# Altium PCB ControllerMain_V1.PcbDoc (part 1 of 2)
Units mil, origin at the board's own origin, x right, y up, seen from the top; angles counter-clockwise.
Board outline 3937.01 x 590.55 mil, 4 copper layers (Top Layer, Layer 1, Layer 2, Bottom Layer), stack 23.756 mil thick; 51 components, 76 nets, 244 pads, 93 vias.
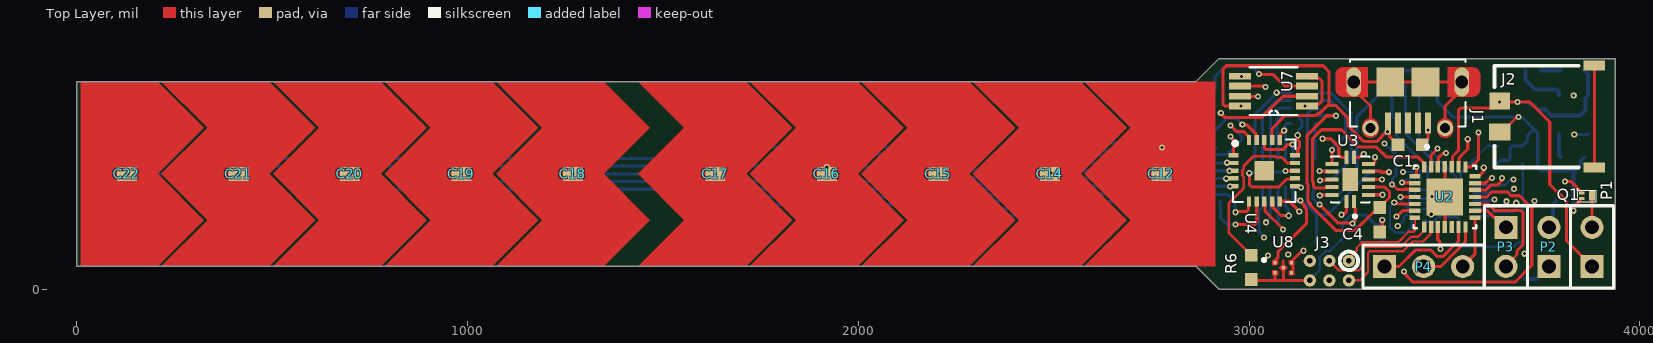
[diagram p0: Top Layer view]
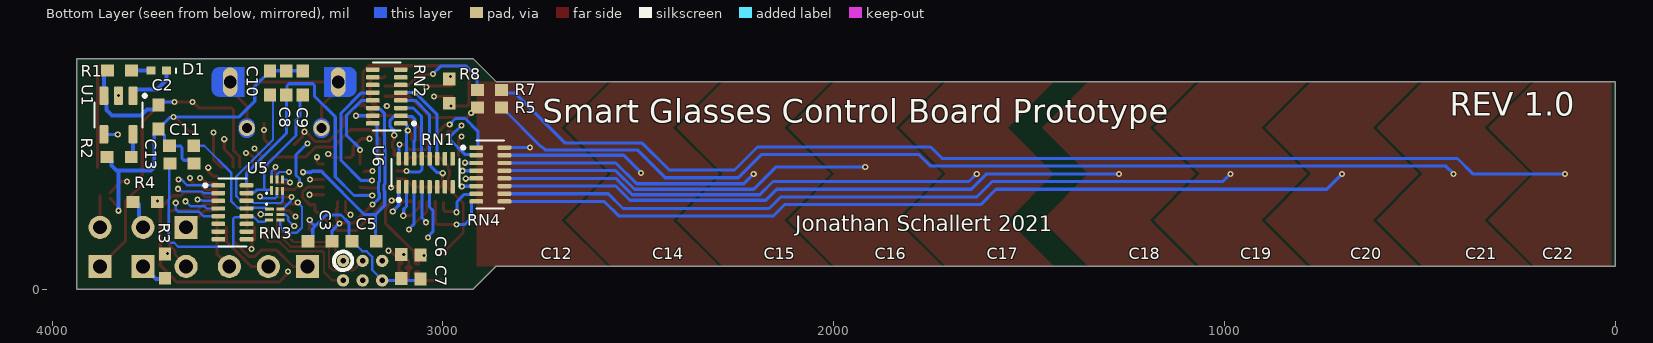
[diagram p1: Bottom Layer view, seen from below]
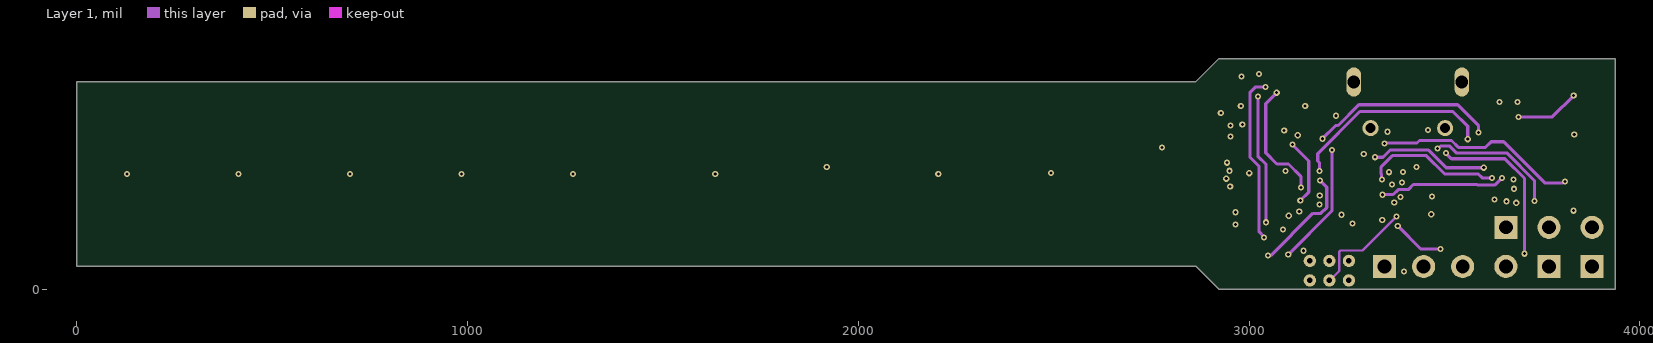
[diagram p2: Layer 1]
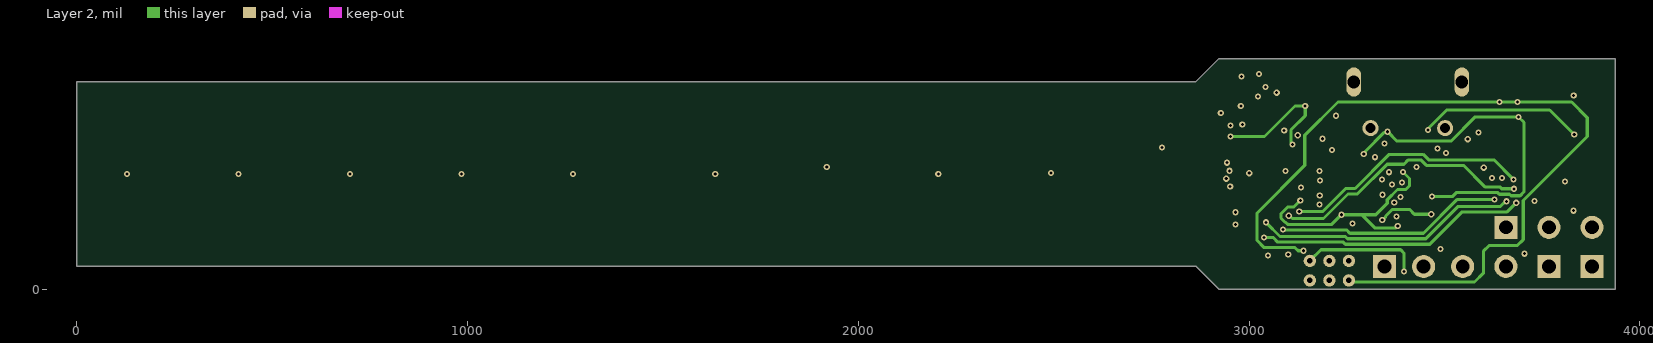
[diagram p3: Layer 2]
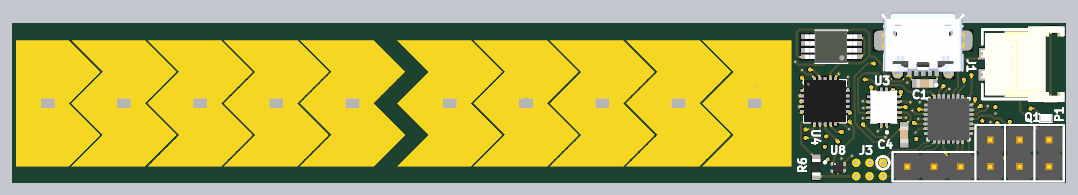
[diagram p5: 3D render of the assembled board from above, using the file's embedded part models]
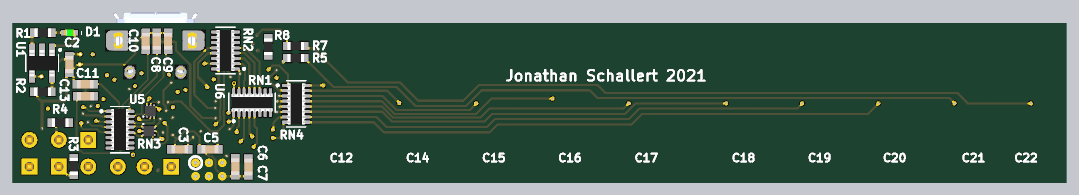
[diagram p6: 3D render of the assembled board from below, using the file's embedded part models]

## Layer stack, top to bottom
Top Solder: solder mask 0.4, Solder Resist, Dk 3.5
Top Layer: signal copper 1.4
Dielectric 2: prepreg 2.8, PP-006, Dk 4.1
Layer 1: signal copper 1.378
Dielectric 1: dielectric 12.6, FR-4, Dk 4.8
Layer 2: signal copper 1.378
Dielectric 3: prepreg 2.8, PP-006, Dk 4.1
Bottom Layer: signal copper 1.4
Bottom Solder: solder mask 0.4, Solder Resist, Dk 3.5

## Board outline
0,59.06 2864.17,59.06 2923.23,0 3937.01,0 3937.01,590.55 2923.23,590.55 2864.17,531.5 0,531.5

## Design rules (kind name [scope] priority, off if disabled: settings)
Clearance [All] p1: gap=5.5 ignorepadtopadclearanceinfootprint=FALSE
MinimumSolderMaskSliver [All] p1: minsoldermaskwidth=2
PolygonConnect [All] p1: connectstyle=Relief reliefconductorwidth=10 reliefentries=4 polygonreliefangle="90 Angle" airgapwidth=10
RoutingVias [All] p1: holewidth=28 width=50 viastyle="Through Hole" minholewidth=28 minwidth=50 maxholewidth=28 maxwidth=50
SilkToSilkClearance [All] p1: silktosilkclearance=6
SilkToSolderMaskClearance [IsPad] p1: minsilkscreentomaskgap=3 clearancetoexposedcopper=TRUE
SolderMaskExpansion [All] p1: expansion=4 istentingtop=FALSE
Width [All] p1: maxlimit=50 minlimit=6 preferedwidth=8
27 further rules are at their usual default settings.

## Components (designator, comment, footprint, x,y, rotation, side; value= is the part's Value field where it differs from the comment)
C1 "4.7uF" 0603_CAP 3412.4,370.08 r0 top
C2 "10uF" 0603_CAP 3728.35,440.94 r90 bottom
C3 "1uF" 0603_CAP 3314.8,123.06 r180 bottom
C4 "1uF" 0603_CAP 3335,178 r90 top
C5 "1uF" 0603_CAP 3201.8,123.06 r180 bottom
C6 "1uF" 0603_CAP 3106.8,58.06 r90 bottom
C7 "1uF" 0603_CAP 3057.8,57.06 r270 bottom
C8 "1uF" 0603_CAP 3400.8,528.06 r270 bottom
C9 "1uF" 0603_CAP 3358.8,528.06 r270 bottom
C10 "1uF" 0603_CAP 3442.8,528.06 r270 bottom
C11 "1uF" 0603_CAP 3668.8,367.06 r180 bottom
C12 "Human Body Model" TOUCHSENSE_SLIDE1-END2 2775.59,295.28 r0 top
C13 "1uF" 0603_CAP 3667.8,322.06 r180 bottom
C14 "Human Body Model" TOUCHSENSE_SLIDE1 2490.16,295.28 r0 top
C15 "Human Body Model" TOUCHSENSE_SLIDE1 2204.72,295.28 r0 top
C16 "Human Body Model" TOUCHSENSE_SLIDE1 1919.29,295.28 r0 top
C17 "Human Body Model" TOUCHSENSE_SLIDE1 1633.86,295.28 r0 top
C18 "Human Body Model" TOUCHSENSE_SLIDE1 1269.69,295.28 r0 top
C19 "Human Body Model" TOUCHSENSE_SLIDE1 984.25,295.28 r0 top
C20 "Human Body Model" TOUCHSENSE_SLIDE1 698.82,295.28 r0 top
C21 "Human Body Model" TOUCHSENSE_SLIDE1 413.39,295.28 r0 top
C22 "Human Body Model" TOUCHSENSE_SLIDE1-END1 127.95,295.28 r0 top
D1 "APHHS1005CGCK" 0402-LED-G 3727.36,560.04 r0 bottom
J1 "ZX62D-B-5P8" Micro_USB 3406.5,527.56 r180 top
J2 "DF59-2S-2V(51)" SNAPBEE_DF59-2S-2V 3762.8,441.93 r270 top
J3 "6 Pin ISP Header" CONN_ISP_TINY 3255.71,72.64 r180 top
P1 "HEADER_1x2_POLAR" PIN2 3877.95,58.46 r90 top
P2 "HEADER_1x2" PIN2 3767.72,58.46 r90 top
P3 "HEADER_1x2" PIN2 3657.48,158.46 r270 top
P4 "HEADER_1x3" PIN3 3346.85,58.07 r0 top
Q1 "CSD17381F4" PICOSTAR-3 3864.8,239.06 r0 top
R1 "220Ω" 0603_RES 3827.76,560.04 r0 bottom
R2 "2K2Ω" 0603_RES 3828.74,338.58 r180 bottom
R3 "100Ω" 0603_RES 3711.61,59.06 r90 bottom
R4 "100Ω" 0603_RES 3762.3,223.43 r180 bottom
R5 "4K99Ω" 0603_RES 2880.8,465.06 r0 bottom
R6 "10KΩ" 0603_RES 3005.8,56.06 r90 top
R7 "4K99Ω" 0603_RES 2880.8,510.06 r0 bottom
R8 "10KΩ" 0603_RES 2983.8,507.06 r270 bottom
RN1 "EXB-Q16P682J" RES-ARRAY-16_EXB 3044.27,298.03 r90 bottom
RN2 "EXB-2HV472JV" RES-ARRAY-16_EXB 3143.77,493.27 r0 bottom
RN3 "EXB-2HV472JV" RES-ARRAY-16_EXB 3538.82,196.84 r180 bottom
RN4 "EXB-2HV472JV" RES-ARRAY-16_EXB 2878.77,293.58 r180 bottom
U1 "MCP73831T-4ADI/OT" SOT-23-5-N 3830.71,445.87 r270 bottom
U2 "ATMEGA328-MMHR" QFN-28_4X4 3501.19,236.25 r270 top
U3 "74LV14BQ,115" DHVQFN-14 3259.14,281.06 r180 top
U4 "MTCH108-I/GZ" UQFN-20_4x4 3039.43,303.31 r0 top
U5 "NC7WZ14FHX" MICROPAK2 3424.8,266.43 r90 bottom
U6 "NC7WZ14FHX" MICROPAK2 3430.8,191.06 r180 bottom
U7 "MTCH102-I/MS" MSOP-8 3062.8,507.06 r180 top
U8 "S-1318D33-A4T2U4" HSNT-4-B 3087.8,55.06 r0 top

## Footprints (in the part's own frame and the unit in brackets; to place one, negate y for a bottom-side part, rotate by r counter-clockwise, add the part's x,y. Pads: shape width x height; smd on the part's side, far side on the other; paste and mask are expansions set on the pad)
0402-LED-G [mm] "Chip LED, Green 0402"
  rect 0.6x0.5 smd: 1(-0.5,0) 2(0.5,0)
  silkscreen extent -1.12,-0.13 -1.12,0.17, body extent -0.5,-0.3 0.5,0.3, height 0.2
0603_CAP [mil]
  rect 33x31.5 smd: 1(-31,0) 2(31,0)
  body extent -32,-16 31,16, height 32
0603_RES [mil]
  rect 33x31.5 smd: 1(-31,0) 2(31,0)
  body extent -31,-16 31,16, height 18
CONN_ISP_TINY [mm]
  round 0.8 hole 0.35 mask+0: 1(0,0) 2(0,1.27) 3(1.27,0) 4(1.27,1.27) 5(2.54,0) 6(2.54,1.27)
  silkscreen extent -0.6,-0.6 0.6,0.6
DHVQFN-14 [mm]
  rrect25% 0.26x0.86 smd: 1(-0.25,1.435) 7(-0.25,-1.435) 8(0.25,-1.435) 14(0.25,1.435)
  rrect25% 0.86x0.26 smd: 2(-1.185,1) 3(-1.185,0.5) 4(-1.185,0) 5(-1.185,-0.5) 6(-1.185,-1) 9(1.185,-1) 10(1.185,-0.5) 11(1.185,0) 12(1.185,0.5) 13(1.185,1)
  rect 1x1.5 smd paste-2: 15(0,0)
  silkscreen extent -1.25,-1.5 1.25,2.5, body extent -1.25,-1.5 1.25,1.5, height 0.86
HSNT-4-B [mm]
  rect 0.2x0.2 smd paste-1 mask+0: 1(-0.53,0.325) 2(-0.53,-0.325) 3(0.53,-0.325) 4(0.53,0.325)
  rect 0.2x0.2 smd paste+0.036 mask+0: 5(0,0)
  Top Layer region: 0.062,0.242 0.304,0 0.062,-0.242 0.062,-0.51 -0.062,-0.51 -0.062,-0.242 -0.304,0 -0.062,0.242 -0.062,0.51 0.062,0.51
  Top Layer region: -0.345,-0.245 -0.345,-0.475 -0.715,-0.475 -0.715,-0.175 -0.415,-0.175
  Top Layer region: 0.715,0.175 0.415,0.175 0.345,0.245 0.345,0.475 0.715,0.475
  Top Layer region: 0.715,-0.475 0.345,-0.475 0.345,-0.245 0.415,-0.175 0.715,-0.175
  Top Layer region: -0.345,0.245 -0.415,0.175 -0.715,0.175 -0.715,0.475 -0.345,0.475
  silkscreen extent -1.35,0.4 -1.15,0.6, body extent -0.53,-0.51 0.53,0.5, height 0.38
Micro_USB [mm]
  rect 0.4x1.35 smd mask+0.051: 1(-1.3,2.6) 2(-0.65,2.6) 3(0,2.6) 4(0.65,2.6) 5(1.3,2.6)
  round 1.05 hole 0.65: S1(-2.425,2.925) S2(2.425,2.925)
  oval 0.95x1.9 hole 0.825: S3(-3.512,-0.075) S6(3.512,-0.075)
  rect 1.8x1.9 smd: S4(-1.15,-0.075) S5(1.15,-0.075)
  Top Layer region: 3.1,-0.075 2.6,-0.075 2.6,0.875 4.2,0.875 4.213,0.875 4.239,0.874 4.265,0.871 4.291,0.867 4.317,0.861 4.342,0.855 4.367,0.846 4.391,0.837 4.415,0.826 4.439,0.815 4.461,0.801 4.483,0.787 4.504,0.772 4.525,0.755 4.544,0.738 4.563,0.719 4.58,0.7 4.597,0.679 4.612,0.658 4.626,0.636 4.64,0.614 4.651,0.59 4.662,0.566 4.671,0.542 4.68,0.517 4.686,0.492 4.692,0.466 4.696,0.44 4.699,0.414 4.7,0.388 4.7,0.375 4.7,-0.075 3.925,-0.075 3.925,0.4 3.925,0.407 3.924,0.422 3.923,0.436 3.92,0.45 3.917,0.464 3.914,0.478 3.909,0.492 3.904,0.505 3.898,0.518 3.892,0.531 3.885,0.544 3.877,0.556 3.868,0.567 3.859,0.579 3.85,0.589 3.839,0.6 3.829,0.609 3.817,0.618 3.806,0.627 3.794,0.635 3.781,0.642 3.768,0.648 3.755,0.654 3.742,0.659 3.728,0.664 3.714,0.667 3.7,0.67 3.686,0.673 3.672,0.674 3.657,0.675 3.65,0.675 3.4,0.675 3.392,0.675 3.376,0.674 3.361,0.673 3.345,0.67 3.33,0.667 3.315,0.663 3.3,0.658 3.285,0.652 3.271,0.646 3.257,0.639 3.243,0.631 3.23,0.622 3.217,0.613 3.205,0.603 3.193,0.593 3.182,0.582 3.172,0.57 3.162,0.558 3.153,0.545 3.144,0.532 3.136,0.518 3.129,0.504 3.123,0.49 3.117,0.475 3.112,0.46 3.108,0.445 3.105,0.43 3.102,0.414 3.101,0.399 3.1,0.383 3.1,0.375 3.1,-0.075
  Top Layer region: -3.1,-0.075 -2.6,-0.075 -2.6,-1.025 -4.2,-1.025 -4.213,-1.025 -4.239,-1.024 -4.265,-1.021 -4.291,-1.017 -4.317,-1.011 -4.342,-1.005 -4.367,-0.996 -4.391,-0.987 -4.415,-0.976 -4.439,-0.965 -4.461,-0.951 -4.483,-0.937 -4.504,-0.922 -4.525,-0.905 -4.544,-0.888 -4.563,-0.869 -4.58,-0.85 -4.597,-0.829 -4.612,-0.808 -4.626,-0.786 -4.64,-0.764 -4.651,-0.74 -4.662,-0.716 -4.671,-0.692 -4.68,-0.667 -4.686,-0.642 -4.692,-0.616 -4.696,-0.59 -4.699,-0.564 -4.7,-0.538 -4.7,-0.525 -4.7,-0.075 -3.925,-0.075 -3.925,-0.55 -3.925,-0.557 -3.924,-0.572 -3.923,-0.586 -3.92,-0.6 -3.917,-0.614 -3.914,-0.628 -3.909,-0.642 -3.904,-0.655 -3.898,-0.668 -3.892,-0.681 -3.885,-0.694 -3.877,-0.706 -3.868,-0.717 -3.859,-0.729 -3.85,-0.739 -3.839,-0.75 -3.829,-0.759 -3.817,-0.768 -3.806,-0.777 -3.794,-0.785 -3.781,-0.792 -3.768,-0.798 -3.755,-0.804 -3.742,-0.809 -3.728,-0.814 -3.714,-0.817 -3.7,-0.82 -3.686,-0.823 -3.672,-0.824 -3.657,-0.825 -3.65,-0.825 -3.4,-0.825 -3.392,-0.825 -3.376,-0.824 -3.361,-0.823 -3.345,-0.82 -3.33,-0.817 -3.315,-0.813 -3.3,-0.808 -3.285,-0.802 -3.271,-0.796 -3.257,-0.789 -3.243,-0.781 -3.23,-0.772 -3.217,-0.763 -3.205,-0.753 -3.193,-0.743 -3.182,-0.732 -3.172,-0.72 -3.162,-0.708 -3.153,-0.695 -3.144,-0.682 -3.136,-0.668 -3.129,-0.654 -3.123,-0.64 -3.117,-0.625 -3.112,-0.61 -3.108,-0.595 -3.105,-0.58 -3.102,-0.564 -3.101,-0.549 -3.1,-0.533 -3.1,-0.525 -3.1,-0.075
  Top Layer region: 2.6,-1.025 4.2,-1.025 4.213,-1.025 4.239,-1.024 4.265,-1.021 4.291,-1.017 4.317,-1.011 4.342,-1.005 4.367,-0.996 4.391,-0.987 4.415,-0.976 4.439,-0.965 4.461,-0.951 4.483,-0.937 4.504,-0.922 4.525,-0.905 4.544,-0.888 4.563,-0.869 4.58,-0.85 4.597,-0.829 4.612,-0.808 4.626,-0.786 4.64,-0.764 4.651,-0.74 4.662,-0.716 4.671,-0.692 4.68,-0.667 4.686,-0.642 4.692,-0.616 4.696,-0.59 4.699,-0.564 4.7,-0.538 4.7,-0.525 4.7,-0.075 3.925,-0.075 3.925,-0.525 3.925,-0.533 3.924,-0.549 3.923,-0.564 3.92,-0.58 3.917,-0.595 3.913,-0.61 3.908,-0.625 3.902,-0.64 3.896,-0.654 3.889,-0.668 3.881,-0.682 3.872,-0.695 3.863,-0.708 3.853,-0.72 3.843,-0.732 3.832,-0.743 3.82,-0.753 3.808,-0.763 3.795,-0.772 3.782,-0.781 3.768,-0.789 3.754,-0.796 3.74,-0.802 3.725,-0.808 3.71,-0.813 3.695,-0.817 3.68,-0.82 3.664,-0.823 3.649,-0.824 3.633,-0.825 3.625,-0.825 3.4,-0.825 3.392,-0.825 3.376,-0.824 3.361,-0.823 3.345,-0.82 3.33,-0.817 3.315,-0.813 3.3,-0.808 3.285,-0.802 3.271,-0.796 3.257,-0.789 3.243,-0.781 3.23,-0.772 3.217,-0.763 3.205,-0.753 3.193,-0.743 3.182,-0.732 3.172,-0.72 3.162,-0.708 3.153,-0.695 3.144,-0.682 3.136,-0.668 3.129,-0.654 3.123,-0.64 3.117,-0.625 3.112,-0.61 3.108,-0.595 3.105,-0.58 3.102,-0.564 3.101,-0.549 3.1,-0.533 3.1,-0.525 3.1,-0.075 2.6,-0.075 2.6,-1.025
  Top Layer region: -2.6,0.875 -4.2,0.875 -4.213,0.875 -4.239,0.874 -4.265,0.871 -4.291,0.867 -4.317,0.861 -4.342,0.855 -4.367,0.846 -4.391,0.837 -4.415,0.826 -4.439,0.815 -4.461,0.801 -4.483,0.787 -4.504,0.772 -4.525,0.755 -4.544,0.738 -4.563,0.719 -4.58,0.7 -4.597,0.679 -4.612,0.658 -4.626,0.636 -4.64,0.614 -4.651,0.59 -4.662,0.566 -4.671,0.542 -4.68,0.517 -4.686,0.492 -4.692,0.466 -4.696,0.44 -4.699,0.414 -4.7,0.388 -4.7,0.375 -4.7,-0.075 -3.925,-0.075 -3.925,0.375 -3.925,0.383 -3.924,0.399 -3.923,0.414 -3.92,0.43 -3.917,0.445 -3.913,0.46 -3.908,0.475 -3.902,0.49 -3.896,0.504 -3.889,0.518 -3.881,0.532 -3.872,0.545 -3.863,0.558 -3.853,0.57 -3.843,0.582 -3.832,0.593 -3.82,0.603 -3.808,0.613 -3.795,0.622 -3.782,0.631 -3.768,0.639 -3.754,0.646 -3.74,0.652 -3.725,0.658 -3.71,0.663 -3.695,0.667 -3.68,0.67 -3.664,0.673 -3.649,0.674 -3.633,0.675 -3.625,0.675 -3.4,0.675 -3.392,0.675 -3.376,0.674 -3.361,0.673 -3.345,0.67 -3.33,0.667 -3.315,0.663 -3.3,0.658 -3.285,0.652 -3.271,0.646 -3.257,0.639 -3.243,0.631 -3.23,0.622 -3.217,0.613 -3.205,0.603 -3.193,0.593 -3.182,0.582 -3.172,0.57 -3.162,0.558 -3.153,0.545 -3.144,0.532 -3.136,0.518 -3.129,0.504 -3.123,0.49 -3.117,0.475 -3.112,0.46 -3.108,0.445 -3.105,0.43 -3.102,0.414 -3.101,0.399 -3.1,0.383 -3.1,0.375 -3.1,-0.075 -2.6,-0.075 -2.6,0.875
  Top Layer region: 2.425,2.5 2.425,2.3 2.411,2.3 2.384,2.301 2.356,2.304 2.329,2.309 2.302,2.314 2.276,2.321 2.25,2.33 2.224,2.34 2.199,2.351 2.174,2.363 2.151,2.377 2.128,2.392 2.105,2.408 2.084,2.426 2.063,2.444 2.044,2.463 2.026,2.484 2.008,2.505 1.992,2.528 1.977,2.551 1.963,2.574 1.951,2.599 1.94,2.624 1.93,2.65 1.921,2.676 1.914,2.702 1.909,2.729 1.904,2.756 1.901,2.784 1.9,2.811 1.9,2.825 1.9,3.025 1.9,3.039 1.901,3.066 1.904,3.094 1.909,3.121 1.914,3.148 1.921,3.174 1.93,3.2 1.94,3.226 1.951,3.251 1.963,3.276 1.977,3.299 1.992,3.322 2.008,3.345 2.026,3.366 2.044,3.387 2.063,3.406 2.084,3.424 2.105,3.442 2.128,3.458 2.151,3.473 2.174,3.487 2.199,3.499 2.224,3.51 2.25,3.52 2.276,3.529 2.302,3.536 2.329,3.541 2.356,3.546 2.384,3.549 2.411,3.55 2.425,3.55 2.425,3.35 2.416,3.35 2.399,3.349 2.383,3.347 2.366,3.345 2.349,3.341 2.333,3.337 2.316,3.331 2.301,3.325 2.285,3.318 2.27,3.311 2.255,3.302 2.241,3.293 2.227,3.283 2.214,3.272 2.201,3.261 2.189,3.249 2.178,3.236 2.167,3.223 2.157,3.209 2.148,3.195 2.139,3.18 2.132,3.165 2.125,3.149 2.119,3.134 2.113,3.117 2.109,3.101 2.105,3.084 2.103,3.067 2.101,3.051 2.1,3.034 2.1,3.025 2.1,2.825 2.1,2.816 2.101,2.799 2.103,2.783 2.105,2.766 2.109,2.749 2.113,2.733 2.119,2.716 2.125,2.701 2.132,2.685 2.139,2.67 2.148,2.655 2.157,2.641 2.167,2.627 2.178,2.614 2.189,2.601 2.201,2.589 2.214,2.578 2.227,2.567 2.241,2.557 2.255,2.548 2.27,2.539 2.285,2.532 2.301,2.525 2.316,2.519 2.333,2.513 2.349,2.509 2.366,2.505 2.383,2.503 2.399,2.501 2.416,2.5 2.425,2.5
  Top Layer region: 2.425,3.35 2.425,3.55 2.439,3.55 2.466,3.549 2.494,3.546 2.521,3.541 2.548,3.536 2.574,3.529 2.6,3.52 2.626,3.51 2.651,3.499 2.676,3.487 2.699,3.473 2.722,3.458 2.745,3.442 2.766,3.424 2.787,3.406 2.806,3.387 2.824,3.366 2.842,3.345 2.858,3.322 2.873,3.299 2.887,3.276 2.899,3.251 2.91,3.226 2.92,3.2 2.929,3.174 2.936,3.148 2.941,3.121 2.946,3.094 2.949,3.066 2.95,3.039 2.95,3.025 2.95,2.825 2.95,2.811 2.949,2.784 2.946,2.756 2.941,2.729 2.936,2.702 2.929,2.676 2.92,2.65 2.91,2.624 2.899,2.599 2.887,2.574 2.873,2.551 2.858,2.528 2.842,2.505 2.824,2.484 2.806,2.463 2.787,2.444 2.766,2.426 2.745,2.408 2.722,2.392 2.699,2.377 2.676,2.363 2.651,2.351 2.626,2.34 2.6,2.33 2.574,2.321 2.548,2.314 2.521,2.309 2.494,2.304 2.466,2.301 2.439,2.3 2.425,2.3 2.425,2.5 2.434,2.5 2.451,2.501 2.467,2.503 2.484,2.505 2.501,2.509 2.517,2.513 2.534,2.519 2.549,2.525 2.565,2.532 2.58,2.539 2.595,2.548 2.609,2.557 2.623,2.567 2.636,2.578 2.649,2.589 2.661,2.601 2.672,2.614 2.683,2.627 2.693,2.641 2.702,2.655 2.711,2.67 2.718,2.685 2.725,2.701 2.731,2.716 2.737,2.733 2.741,2.749 2.745,2.766 2.747,2.783 2.749,2.799 2.75,2.816 2.75,2.825 2.75,3.025 2.75,3.034 2.749,3.051 2.747,3.067 2.745,3.084 2.741,3.101 2.737,3.117 2.731,3.134 2.725,3.149 2.718,3.165 2.711,3.18 2.702,3.195 2.693,3.209 2.683,3.223 2.672,3.236 2.661,3.249 2.649,3.261 2.636,3.272 2.623,3.283 2.609,3.293 2.595,3.302 2.58,3.311 2.565,3.318 2.549,3.325 2.534,3.331 2.517,3.337 2.501,3.341 2.484,3.345 2.467,3.347 2.451,3.349 2.434,3.35 2.425,3.35
  Top Layer region: -2.425,2.5 -2.425,2.3 -2.439,2.3 -2.466,2.301 -2.494,2.304 -2.521,2.309 -2.548,2.314 -2.574,2.321 -2.6,2.33 -2.626,2.34 -2.651,2.351 -2.676,2.363 -2.699,2.377 -2.722,2.392 -2.745,2.408 -2.766,2.426 -2.787,2.444 -2.806,2.463 -2.824,2.484 -2.842,2.505 -2.858,2.528 -2.873,2.551 -2.887,2.574 -2.899,2.599 -2.91,2.624 -2.92,2.65 -2.929,2.676 -2.936,2.702 -2.941,2.729 -2.946,2.756 -2.949,2.784 -2.95,2.811 -2.95,2.825 -2.95,3.025 -2.95,3.039 -2.949,3.066 -2.946,3.094 -2.941,3.121 -2.936,3.148 -2.929,3.174 -2.92,3.2 -2.91,3.226 -2.899,3.251 -2.887,3.276 -2.873,3.299 -2.858,3.322 -2.842,3.345 -2.824,3.366 -2.806,3.387 -2.787,3.406 -2.766,3.424 -2.745,3.442 -2.722,3.458 -2.699,3.473 -2.676,3.487 -2.651,3.499 -2.626,3.51 -2.6,3.52 -2.574,3.529 -2.548,3.536 -2.521,3.541 -2.494,3.546 -2.466,3.549 -2.439,3.55 -2.425,3.55 -2.425,3.35 -2.434,3.35 -2.451,3.349 -2.467,3.347 -2.484,3.345 -2.501,3.341 -2.517,3.337 -2.534,3.331 -2.549,3.325 -2.565,3.318 -2.58,3.311 -2.595,3.302 -2.609,3.293 -2.623,3.283 -2.636,3.272 -2.649,3.261 -2.661,3.249 -2.672,3.236 -2.683,3.223 -2.693,3.209 -2.702,3.195 -2.711,3.18 -2.718,3.165 -2.725,3.149 -2.731,3.134 -2.737,3.117 -2.741,3.101 -2.745,3.084 -2.747,3.067 -2.749,3.051 -2.75,3.034 -2.75,3.025 -2.75,2.825 -2.75,2.816 -2.749,2.799 -2.747,2.783 -2.745,2.766 -2.741,2.749 -2.737,2.733 -2.731,2.716 -2.725,2.701 -2.718,2.685 -2.711,2.67 -2.702,2.655 -2.693,2.641 -2.683,2.627 -2.672,2.614 -2.661,2.601 -2.649,2.589 -2.636,2.578 -2.623,2.567 -2.609,2.557 -2.595,2.548 -2.58,2.539 -2.565,2.532 -2.549,2.525 -2.534,2.519 -2.517,2.513 -2.501,2.509 -2.484,2.505 -2.467,2.503 -2.451,2.501 -2.434,2.5 -2.425,2.5
  Top Layer region: -2.425,3.35 -2.425,3.55 -2.411,3.55 -2.384,3.549 -2.356,3.546 -2.329,3.541 -2.302,3.536 -2.276,3.529 -2.25,3.52 -2.224,3.51 -2.199,3.499 -2.174,3.487 -2.151,3.473 -2.128,3.458 -2.105,3.442 -2.084,3.424 -2.063,3.406 -2.044,3.387 -2.026,3.366 -2.008,3.345 -1.992,3.322 -1.977,3.299 -1.963,3.276 -1.951,3.251 -1.94,3.226 -1.93,3.2 -1.921,3.174 -1.914,3.148 -1.909,3.121 -1.904,3.094 -1.901,3.066 -1.9,3.039 -1.9,3.025 -1.9,2.825 -1.9,2.811 -1.901,2.784 -1.904,2.756 -1.909,2.729 -1.914,2.702 -1.921,2.676 -1.93,2.65 -1.94,2.624 -1.951,2.599 -1.963,2.574 -1.977,2.551 -1.992,2.528 -2.008,2.505 -2.026,2.484 -2.044,2.463 -2.063,2.444 -2.084,2.426 -2.105,2.408 -2.128,2.392 -2.151,2.377 -2.174,2.363 -2.199,2.351 -2.224,2.34 -2.25,2.33 -2.276,2.321 -2.302,2.314 -2.329,2.309 -2.356,2.304 -2.384,2.301 -2.411,2.3 -2.425,2.3 -2.425,2.5 -2.416,2.5 -2.399,2.501 -2.383,2.503 -2.366,2.505 -2.349,2.509 -2.333,2.513 -2.316,2.519 -2.301,2.525 -2.285,2.532 -2.27,2.539 -2.255,2.548 -2.241,2.557 -2.227,2.567 -2.214,2.578 -2.201,2.589 -2.189,2.601 -2.178,2.614 -2.167,2.627 -2.157,2.641 -2.148,2.655 -2.139,2.67 -2.132,2.685 -2.125,2.701 -2.119,2.716 -2.113,2.733 -2.109,2.749 -2.105,2.766 -2.103,2.783 -2.101,2.799 -2.1,2.816 -2.1,2.825 -2.1,3.025 -2.1,3.034 -2.101,3.051 -2.103,3.067 -2.105,3.084 -2.109,3.101 -2.113,3.117 -2.119,3.134 -2.125,3.149 -2.132,3.165 -2.139,3.18 -2.148,3.195 -2.157,3.209 -2.167,3.223 -2.178,3.236 -2.189,3.249 -2.201,3.261 -2.214,3.272 -2.227,3.283 -2.241,3.293 -2.255,3.302 -2.27,3.311 -2.285,3.318 -2.301,3.325 -2.316,3.331 -2.333,3.337 -2.349,3.341 -2.366,3.345 -2.383,3.347 -2.399,3.349 -2.416,3.35 -2.425,3.35
  Bottom Layer region: 3.1,-0.075 2.6,-0.075 2.6,0.875 4.2,0.875 4.213,0.875 4.239,0.874 4.265,0.871 4.291,0.867 4.317,0.861 4.342,0.855 4.367,0.846 4.391,0.837 4.415,0.826 4.439,0.815 4.461,0.801 4.483,0.787 4.504,0.772 4.525,0.755 4.544,0.738 4.563,0.719 4.58,0.7 4.597,0.679 4.612,0.658 4.626,0.636 4.64,0.614 4.651,0.59 4.662,0.566 4.671,0.542 4.68,0.517 4.686,0.492 4.692,0.466 4.696,0.44 4.699,0.414 4.7,0.388 4.7,0.375 4.7,-0.075 3.925,-0.075 3.925,0.4 3.925,0.407 3.924,0.422 3.923,0.436 3.92,0.45 3.917,0.464 3.914,0.478 3.909,0.492 3.904,0.505 3.898,0.518 3.892,0.531 3.885,0.544 3.877,0.556 3.868,0.567 3.859,0.579 3.85,0.589 3.839,0.6 3.829,0.609 3.817,0.618 3.806,0.627 3.794,0.635 3.781,0.642 3.768,0.648 3.755,0.654 3.742,0.659 3.728,0.664 3.714,0.667 3.7,0.67 3.686,0.673 3.672,0.674 3.657,0.675 3.65,0.675 3.4,0.675 3.392,0.675 3.376,0.674 3.361,0.673 3.345,0.67 3.33,0.667 3.315,0.663 3.3,0.658 3.285,0.652 3.271,0.646 3.257,0.639 3.243,0.631 3.23,0.622 3.217,0.613 3.205,0.603 3.193,0.593 3.182,0.582 3.172,0.57 3.162,0.558 3.153,0.545 3.144,0.532 3.136,0.518 3.129,0.504 3.123,0.49 3.117,0.475 3.112,0.46 3.108,0.445 3.105,0.43 3.102,0.414 3.101,0.399 3.1,0.383 3.1,0.375 3.1,-0.075
  Bottom Layer region: -3.1,-0.075 -2.6,-0.075 -2.6,-1.025 -4.2,-1.025 -4.213,-1.025 -4.239,-1.024 -4.265,-1.021 -4.291,-1.017 -4.317,-1.011 -4.342,-1.005 -4.367,-0.996 -4.391,-0.987 -4.415,-0.976 -4.439,-0.965 -4.461,-0.951 -4.483,-0.937 -4.504,-0.922 -4.525,-0.905 -4.544,-0.888 -4.563,-0.869 -4.58,-0.85 -4.597,-0.829 -4.612,-0.808 -4.626,-0.786 -4.64,-0.764 -4.651,-0.74 -4.662,-0.716 -4.671,-0.692 -4.68,-0.667 -4.686,-0.642 -4.692,-0.616 -4.696,-0.59 -4.699,-0.564 -4.7,-0.538 -4.7,-0.525 -4.7,-0.075 -3.925,-0.075 -3.925,-0.55 -3.925,-0.557 -3.924,-0.572 -3.923,-0.586 -3.92,-0.6 -3.917,-0.614 -3.914,-0.628 -3.909,-0.642 -3.904,-0.655 -3.898,-0.668 -3.892,-0.681 -3.885,-0.694 -3.877,-0.706 -3.868,-0.717 -3.859,-0.729 -3.85,-0.739 -3.839,-0.75 -3.829,-0.759 -3.817,-0.768 -3.806,-0.777 -3.794,-0.785 -3.781,-0.792 -3.768,-0.798 -3.755,-0.804 -3.742,-0.809 -3.728,-0.814 -3.714,-0.817 -3.7,-0.82 -3.686,-0.823 -3.672,-0.824 -3.657,-0.825 -3.65,-0.825 -3.4,-0.825 -3.392,-0.825 -3.376,-0.824 -3.361,-0.823 -3.345,-0.82 -3.33,-0.817 -3.315,-0.813 -3.3,-0.808 -3.285,-0.802 -3.271,-0.796 -3.257,-0.789 -3.243,-0.781 -3.23,-0.772 -3.217,-0.763 -3.205,-0.753 -3.193,-0.743 -3.182,-0.732 -3.172,-0.72 -3.162,-0.708 -3.153,-0.695 -3.144,-0.682 -3.136,-0.668 -3.129,-0.654 -3.123,-0.64 -3.117,-0.625 -3.112,-0.61 -3.108,-0.595 -3.105,-0.58 -3.102,-0.564 -3.101,-0.549 -3.1,-0.533 -3.1,-0.525 -3.1,-0.075
  Bottom Layer region: 2.6,-1.025 4.2,-1.025 4.213,-1.025 4.239,-1.024 4.265,-1.021 4.291,-1.017 4.317,-1.011 4.342,-1.005 4.367,-0.996 4.391,-0.987 4.415,-0.976 4.439,-0.965 4.461,-0.951 4.483,-0.937 4.504,-0.922 4.525,-0.905 4.544,-0.888 4.563,-0.869 4.58,-0.85 4.597,-0.829 4.612,-0.808 4.626,-0.786 4.64,-0.764 4.651,-0.74 4.662,-0.716 4.671,-0.692 4.68,-0.667 4.686,-0.642 4.692,-0.616 4.696,-0.59 4.699,-0.564 4.7,-0.538 4.7,-0.525 4.7,-0.075 3.925,-0.075 3.925,-0.525 3.925,-0.533 3.924,-0.549 3.923,-0.564 3.92,-0.58 3.917,-0.595 3.913,-0.61 3.908,-0.625 3.902,-0.64 3.896,-0.654 3.889,-0.668 3.881,-0.682 3.872,-0.695 3.863,-0.708 3.853,-0.72 3.843,-0.732 3.832,-0.743 3.82,-0.753 3.808,-0.763 3.795,-0.772 3.782,-0.781 3.768,-0.789 3.754,-0.796 3.74,-0.802 3.725,-0.808 3.71,-0.813 3.695,-0.817 3.68,-0.82 3.664,-0.823 3.649,-0.824 3.633,-0.825 3.625,-0.825 3.4,-0.825 3.392,-0.825 3.376,-0.824 3.361,-0.823 3.345,-0.82 3.33,-0.817 3.315,-0.813 3.3,-0.808 3.285,-0.802 3.271,-0.796 3.257,-0.789 3.243,-0.781 3.23,-0.772 3.217,-0.763 3.205,-0.753 3.193,-0.743 3.182,-0.732 3.172,-0.72 3.162,-0.708 3.153,-0.695 3.144,-0.682 3.136,-0.668 3.129,-0.654 3.123,-0.64 3.117,-0.625 3.112,-0.61 3.108,-0.595 3.105,-0.58 3.102,-0.564 3.101,-0.549 3.1,-0.533 3.1,-0.525 3.1,-0.075 2.6,-0.075 2.6,-1.025
  Bottom Layer region: -2.6,0.875 -4.2,0.875 -4.213,0.875 -4.239,0.874 -4.265,0.871 -4.291,0.867 -4.317,0.861 -4.342,0.855 -4.367,0.846 -4.391,0.837 -4.415,0.826 -4.439,0.815 -4.461,0.801 -4.483,0.787 -4.504,0.772 -4.525,0.755 -4.544,0.738 -4.563,0.719 -4.58,0.7 -4.597,0.679 -4.612,0.658 -4.626,0.636 -4.64,0.614 -4.651,0.59 -4.662,0.566 -4.671,0.542 -4.68,0.517 -4.686,0.492 -4.692,0.466 -4.696,0.44 -4.699,0.414 -4.7,0.388 -4.7,0.375 -4.7,-0.075 -3.925,-0.075 -3.925,0.375 -3.925,0.383 -3.924,0.399 -3.923,0.414 -3.92,0.43 -3.917,0.445 -3.913,0.46 -3.908,0.475 -3.902,0.49 -3.896,0.504 -3.889,0.518 -3.881,0.532 -3.872,0.545 -3.863,0.558 -3.853,0.57 -3.843,0.582 -3.832,0.593 -3.82,0.603 -3.808,0.613 -3.795,0.622 -3.782,0.631 -3.768,0.639 -3.754,0.646 -3.74,0.652 -3.725,0.658 -3.71,0.663 -3.695,0.667 -3.68,0.67 -3.664,0.673 -3.649,0.674 -3.633,0.675 -3.625,0.675 -3.4,0.675 -3.392,0.675 -3.376,0.674 -3.361,0.673 -3.345,0.67 -3.33,0.667 -3.315,0.663 -3.3,0.658 -3.285,0.652 -3.271,0.646 -3.257,0.639 -3.243,0.631 -3.23,0.622 -3.217,0.613 -3.205,0.603 -3.193,0.593 -3.182,0.582 -3.172,0.57 -3.162,0.558 -3.153,0.545 -3.144,0.532 -3.136,0.518 -3.129,0.504 -3.123,0.49 -3.117,0.475 -3.112,0.46 -3.108,0.445 -3.105,0.43 -3.102,0.414 -3.101,0.399 -3.1,0.383 -3.1,0.375 -3.1,-0.075 -2.6,-0.075 -2.6,0.875
  Bottom Layer region: 2.425,2.5 2.425,2.3 2.411,2.3 2.384,2.301 2.356,2.304 2.329,2.309 2.302,2.314 2.276,2.321 2.25,2.33 2.224,2.34 2.199,2.351 2.174,2.363 2.151,2.377 2.128,2.392 2.105,2.408 2.084,2.426 2.063,2.444 2.044,2.463 2.026,2.484 2.008,2.505 1.992,2.528 1.977,2.551 1.963,2.574 1.951,2.599 1.94,2.624 1.93,2.65 1.921,2.676 1.914,2.702 1.909,2.729 1.904,2.756 1.901,2.784 1.9,2.811 1.9,2.825 1.9,3.025 1.9,3.039 1.901,3.066 1.904,3.094 1.909,3.121 1.914,3.148 1.921,3.174 1.93,3.2 1.94,3.226 1.951,3.251 1.963,3.276 1.977,3.299 1.992,3.322 2.008,3.345 2.026,3.366 2.044,3.387 2.063,3.406 2.084,3.424 2.105,3.442 2.128,3.458 2.151,3.473 2.174,3.487 2.199,3.499 2.224,3.51 2.25,3.52 2.276,3.529 2.302,3.536 2.329,3.541 2.356,3.546 2.384,3.549 2.411,3.55 2.425,3.55 2.425,3.35 2.416,3.35 2.399,3.349 2.383,3.347 2.366,3.345 2.349,3.341 2.333,3.337 2.316,3.331 2.301,3.325 2.285,3.318 2.27,3.311 2.255,3.302 2.241,3.293 2.227,3.283 2.214,3.272 2.201,3.261 2.189,3.249 2.178,3.236 2.167,3.223 2.157,3.209 2.148,3.195 2.139,3.18 2.132,3.165 2.125,3.149 2.119,3.134 2.113,3.117 2.109,3.101 2.105,3.084 2.103,3.067 2.101,3.051 2.1,3.034 2.1,3.025 2.1,2.825 2.1,2.816 2.101,2.799 2.103,2.783 2.105,2.766 2.109,2.749 2.113,2.733 2.119,2.716 2.125,2.701 2.132,2.685 2.139,2.67 2.148,2.655 2.157,2.641 2.167,2.627 2.178,2.614 2.189,2.601 2.201,2.589 2.214,2.578 2.227,2.567 2.241,2.557 2.255,2.548 2.27,2.539 2.285,2.532 2.301,2.525 2.316,2.519 2.333,2.513 2.349,2.509 2.366,2.505 2.383,2.503 2.399,2.501 2.416,2.5 2.425,2.5
  Bottom Layer region: 2.425,3.35 2.425,3.55 2.439,3.55 2.466,3.549 2.494,3.546 2.521,3.541 2.548,3.536 2.574,3.529 2.6,3.52 2.626,3.51 2.651,3.499 2.676,3.487 2.699,3.473 2.722,3.458 2.745,3.442 2.766,3.424 2.787,3.406 2.806,3.387 2.824,3.366 2.842,3.345 2.858,3.322 2.873,3.299 2.887,3.276 2.899,3.251 2.91,3.226 2.92,3.2 2.929,3.174 2.936,3.148 2.941,3.121 2.946,3.094 2.949,3.066 2.95,3.039 2.95,3.025 2.95,2.825 2.95,2.811 2.949,2.784 2.946,2.756 2.941,2.729 2.936,2.702 2.929,2.676 2.92,2.65 2.91,2.624 2.899,2.599 2.887,2.574 2.873,2.551 2.858,2.528 2.842,2.505 2.824,2.484 2.806,2.463 2.787,2.444 2.766,2.426 2.745,2.408 2.722,2.392 2.699,2.377 2.676,2.363 2.651,2.351 2.626,2.34 2.6,2.33 2.574,2.321 2.548,2.314 2.521,2.309 2.494,2.304 2.466,2.301 2.439,2.3 2.425,2.3 2.425,2.5 2.434,2.5 2.451,2.501 2.467,2.503 2.484,2.505 2.501,2.509 2.517,2.513 2.534,2.519 2.549,2.525 2.565,2.532 2.58,2.539 2.595,2.548 2.609,2.557 2.623,2.567 2.636,2.578 2.649,2.589 2.661,2.601 2.672,2.614 2.683,2.627 2.693,2.641 2.702,2.655 2.711,2.67 2.718,2.685 2.725,2.701 2.731,2.716 2.737,2.733 2.741,2.749 2.745,2.766 2.747,2.783 2.749,2.799 2.75,2.816 2.75,2.825 2.75,3.025 2.75,3.034 2.749,3.051 2.747,3.067 2.745,3.084 2.741,3.101 2.737,3.117 2.731,3.134 2.725,3.149 2.718,3.165 2.711,3.18 2.702,3.195 2.693,3.209 2.683,3.223 2.672,3.236 2.661,3.249 2.649,3.261 2.636,3.272 2.623,3.283 2.609,3.293 2.595,3.302 2.58,3.311 2.565,3.318 2.549,3.325 2.534,3.331 2.517,3.337 2.501,3.341 2.484,3.345 2.467,3.347 2.451,3.349 2.434,3.35 2.425,3.35
  Bottom Layer region: -2.425,2.5 -2.425,2.3 -2.439,2.3 -2.466,2.301 -2.494,2.304 -2.521,2.309 -2.548,2.314 -2.574,2.321 -2.6,2.33 -2.626,2.34 -2.651,2.351 -2.676,2.363 -2.699,2.377 -2.722,2.392 -2.745,2.408 -2.766,2.426 -2.787,2.444 -2.806,2.463 -2.824,2.484 -2.842,2.505 -2.858,2.528 -2.873,2.551 -2.887,2.574 -2.899,2.599 -2.91,2.624 -2.92,2.65 -2.929,2.676 -2.936,2.702 -2.941,2.729 -2.946,2.756 -2.949,2.784 -2.95,2.811 -2.95,2.825 -2.95,3.025 -2.95,3.039 -2.949,3.066 -2.946,3.094 -2.941,3.121 -2.936,3.148 -2.929,3.174 -2.92,3.2 -2.91,3.226 -2.899,3.251 -2.887,3.276 -2.873,3.299 -2.858,3.322 -2.842,3.345 -2.824,3.366 -2.806,3.387 -2.787,3.406 -2.766,3.424 -2.745,3.442 -2.722,3.458 -2.699,3.473 -2.676,3.487 -2.651,3.499 -2.626,3.51 -2.6,3.52 -2.574,3.529 -2.548,3.536 -2.521,3.541 -2.494,3.546 -2.466,3.549 -2.439,3.55 -2.425,3.55 -2.425,3.35 -2.434,3.35 -2.451,3.349 -2.467,3.347 -2.484,3.345 -2.501,3.341 -2.517,3.337 -2.534,3.331 -2.549,3.325 -2.565,3.318 -2.58,3.311 -2.595,3.302 -2.609,3.293 -2.623,3.283 -2.636,3.272 -2.649,3.261 -2.661,3.249 -2.672,3.236 -2.683,3.223 -2.693,3.209 -2.702,3.195 -2.711,3.18 -2.718,3.165 -2.725,3.149 -2.731,3.134 -2.737,3.117 -2.741,3.101 -2.745,3.084 -2.747,3.067 -2.749,3.051 -2.75,3.034 -2.75,3.025 -2.75,2.825 -2.75,2.816 -2.749,2.799 -2.747,2.783 -2.745,2.766 -2.741,2.749 -2.737,2.733 -2.731,2.716 -2.725,2.701 -2.718,2.685 -2.711,2.67 -2.702,2.655 -2.693,2.641 -2.683,2.627 -2.672,2.614 -2.661,2.601 -2.649,2.589 -2.636,2.578 -2.623,2.567 -2.609,2.557 -2.595,2.548 -2.58,2.539 -2.565,2.532 -2.549,2.525 -2.534,2.519 -2.517,2.513 -2.501,2.509 -2.484,2.505 -2.467,2.503 -2.451,2.501 -2.434,2.5 -2.425,2.5
  Bottom Layer region: -2.425,3.35 -2.425,3.55 -2.411,3.55 -2.384,3.549 -2.356,3.546 -2.329,3.541 -2.302,3.536 -2.276,3.529 -2.25,3.52 -2.224,3.51 -2.199,3.499 -2.174,3.487 -2.151,3.473 -2.128,3.458 -2.105,3.442 -2.084,3.424 -2.063,3.406 -2.044,3.387 -2.026,3.366 -2.008,3.345 -1.992,3.322 -1.977,3.299 -1.963,3.276 -1.951,3.251 -1.94,3.226 -1.93,3.2 -1.921,3.174 -1.914,3.148 -1.909,3.121 -1.904,3.094 -1.901,3.066 -1.9,3.039 -1.9,3.025 -1.9,2.825 -1.9,2.811 -1.901,2.784 -1.904,2.756 -1.909,2.729 -1.914,2.702 -1.921,2.676 -1.93,2.65 -1.94,2.624 -1.951,2.599 -1.963,2.574 -1.977,2.551 -1.992,2.528 -2.008,2.505 -2.026,2.484 -2.044,2.463 -2.063,2.444 -2.084,2.426 -2.105,2.408 -2.128,2.392 -2.151,2.377 -2.174,2.363 -2.199,2.351 -2.224,2.34 -2.25,2.33 -2.276,2.321 -2.302,2.314 -2.329,2.309 -2.356,2.304 -2.384,2.301 -2.411,2.3 -2.425,2.3 -2.425,2.5 -2.416,2.5 -2.399,2.501 -2.383,2.503 -2.366,2.505 -2.349,2.509 -2.333,2.513 -2.316,2.519 -2.301,2.525 -2.285,2.532 -2.27,2.539 -2.255,2.548 -2.241,2.557 -2.227,2.567 -2.214,2.578 -2.201,2.589 -2.189,2.601 -2.178,2.614 -2.167,2.627 -2.157,2.641 -2.148,2.655 -2.139,2.67 -2.132,2.685 -2.125,2.701 -2.119,2.716 -2.113,2.733 -2.109,2.749 -2.105,2.766 -2.103,2.783 -2.101,2.799 -2.1,2.816 -2.1,2.825 -2.1,3.025 -2.1,3.034 -2.101,3.051 -2.103,3.067 -2.105,3.084 -2.109,3.101 -2.113,3.117 -2.119,3.134 -2.125,3.149 -2.132,3.165 -2.139,3.18 -2.148,3.195 -2.157,3.209 -2.167,3.223 -2.178,3.236 -2.189,3.249 -2.201,3.261 -2.214,3.272 -2.227,3.283 -2.241,3.293 -2.255,3.302 -2.27,3.311 -2.285,3.318 -2.301,3.325 -2.316,3.331 -2.333,3.337 -2.349,3.341 -2.366,3.345 -2.383,3.347 -2.399,3.349 -2.416,3.35 -2.425,3.35
  silkscreen extent -3.75,-1.53 3.75,4.24, body extent -4.03,-2.75 4.06,3.05, height 2.71
MICROPAK2 [mm]
  rrect18% 0.57x0.19 smd mask+0.14: 1(-0.34,0.35)
  rrect18% 0.52x0.19 smd mask+0.14: 2(-0.365,0) 3(-0.365,-0.35) 4(0.365,-0.35) 5(0.365,0) 6(0.365,0.35)
  silkscreen extent -0.53,0.67 -0.52,0.68, body extent -0.49,-0.49 0.5,0.5, height 0.56
MSOP-8 [mil]
  rect 56x17 smd mask+4.72: 1(-86,38) 2(-86,13) 3(-86,-13) 4(-86,-38) 5(86,-38) 6(86,-13) 7(86,13) 8(86,38)
  silkscreen extent -61,-61 61,61, body extent -95,-61 99,61, height 42
PICOSTAR-3 [mm]
  rect 0.38x0.63 smd mask+0: 1(0.33,0)
  rect 0.38x0.2 smd mask+0: 2(-0.33,0.175) 3(-0.33,-0.175)
  silkscreen extent -0.65,-0.4 0.6,0.45, body extent -0.5,-0.3 0.5,0.3, height 0.35
PIN2 [mm] "2x1 Header 0.1mm"
  rect 1.5x1.5 hole 0.9: 1(0,0)
  round 1.5 hole 0.9: 2(2.54,0)
  silkscreen extent -1.4,-1.4 3.94,1.4, body extent -1.27,-1.27 3.81,1.27, height 10.11
PIN3 [mm] "2x1 Header 0.1mm"
  rect 1.5x1.5 hole 0.9: 1(0,0)
  round 1.5 hole 0.9: 2(2.54,0) 3(5.08,0)
  silkscreen extent -1.4,-1.4 6.48,1.4, body extent -1.27,-1.27 6.35,1.27, height 10.11
QFN-28_4X4 [mil]
  rect 28x11 smd mask+2: 1(-77,53) 7(-77,-53) 15(77,-53) 21(77,53)
  rect 30x11 smd mask+2: 2(-77,35) 3(-77,18) 4(-77,0) 5(-77,-18) 6(-77,-35) 16(77,-35) 17(77,-18) 18(77,0) 19(77,18) 20(77,35)
  rect 11x28 smd mask+2: 8(-53,-77) 14(53,-77) 22(53,77) 28(-53,77)
  rect 11x30 smd mask+2: 9(-35,-77) 10(-18,-77) 11(0,-77) 12(18,-77) 13(35,-77) 23(35,77) 24(18,77) 25(0,77) 26(-18,77) 27(-35,77)
  rect 94x94 smd: 29(0,0)
  silkscreen extent -80,-80 80,80, body extent -77,-79 80,79, height 30
RES-ARRAY-16_EXB [mm]
  rrect50% 0.89x0.29 smd paste+0 mask+0.127: 1(-0.915,1.75) 2(-0.915,1.25) 3(-0.915,0.75) 4(-0.915,0.25) 5(-0.915,-0.25) 6(-0.915,-0.75) 7(-0.915,-1.25) 8(-0.915,-1.75) 9(0.915,-1.75) 10(0.915,-1.25) 11(0.915,-0.75) 12(0.915,-0.25) 13(0.915,0.25) 14(0.915,0.75) 15(0.915,1.25) 16(0.915,1.75)
  silkscreen extent -1.86,-2.21 0.9,2.21, body extent -0.9,-1.95 0.9,1.95, height 0.55
SNAPBEE_DF59-2S-2V [mm] "CONN SSL RCPT 2POS 2MM SOLDER"
  rect 1.1x1.35 smd: 1(-1,-3.075)
  rect 1.1x1.4 smd: 2(1,-3.075)
  rect 0.65x1.4 smd: S1(-3.31,3.075) S2(3.31,3.075)
  silkscreen extent -3.3,-3.43 3.3,2.03, body extent -3.6,-3.56 3.6,4.39, height 2.31
SOT-23-5-N [mm]
  rrect25% 1.21x0.58 smd: 1(-1.255,0.95) 2(-1.255,0) 3(-1.255,-0.95) 4(1.255,-0.95) 5(1.255,0.95)
  silkscreen extent -1.36,-1.56 0.8,1.81, body extent -1.25,-1.5 1.25,1.5, height 1.11
TOUCHSENSE_SLIDE1 [mm] "Touch Pad, Slide 1"
  rect 1.3x0.9 smd: 1(0,0)
  Top Layer region: -5,6 -2,3 -5,0 -2,-3 -5,-6 2,-6 5,-3 2,0 5,3 2,6
TOUCHSENSE_SLIDE1-END1 [mm] "Touch Pad, Slide 1"
  rect 1.3x0.9 smd: 1(0,0)
  Top Layer region: -3,-6 -1.5,-6 -1.5,6 -3,6
  Top Layer region: -3,6 -2,3 -3,0 -2,-3 -3,-6 2,-6 5,-3 2,0 5,3 2,6
TOUCHSENSE_SLIDE1-END2 [mm] "Touch Pad, Slide 1, END"
  rect 1.3x0.9 smd: 1(0,0)
  Top Layer region: 3.5,6 3.5,-6 2,-6 2,6
  Top Layer region: -5,6 -2,3 -5,0 -2,-3 -5,-6 2,-6 3.5,-3 2,0 3.5,3 2,6
UQFN-20_4x4 [mm]
  rect 0.65x0.285 smd mask+0.127: 1(-2,1) 2(-2,0.5) 3(-2,0) 4(-2,-0.5) 5(-2,-1) 11(2,-1) 12(2,-0.5) 13(2,0) 14(2,0.5) 15(2,1)
  rect 0.285x0.65 smd mask+0.127: 6(-1,-2) 7(-0.5,-2) 8(0,-2) 9(0.5,-2) 10(1,-2) 16(1,2) 17(0.5,2) 18(0,2) 19(-0.5,2) 20(-1,2)
  rect 1.27x1.27 smd: 21(0,0)
  silkscreen extent -2.03,-2.03 2.03,2.03, body extent -2.01,-2.01 2.01,2.01, height 0.81